# EAGLE board PTGSCH3 (EAGLE 7.7.0)
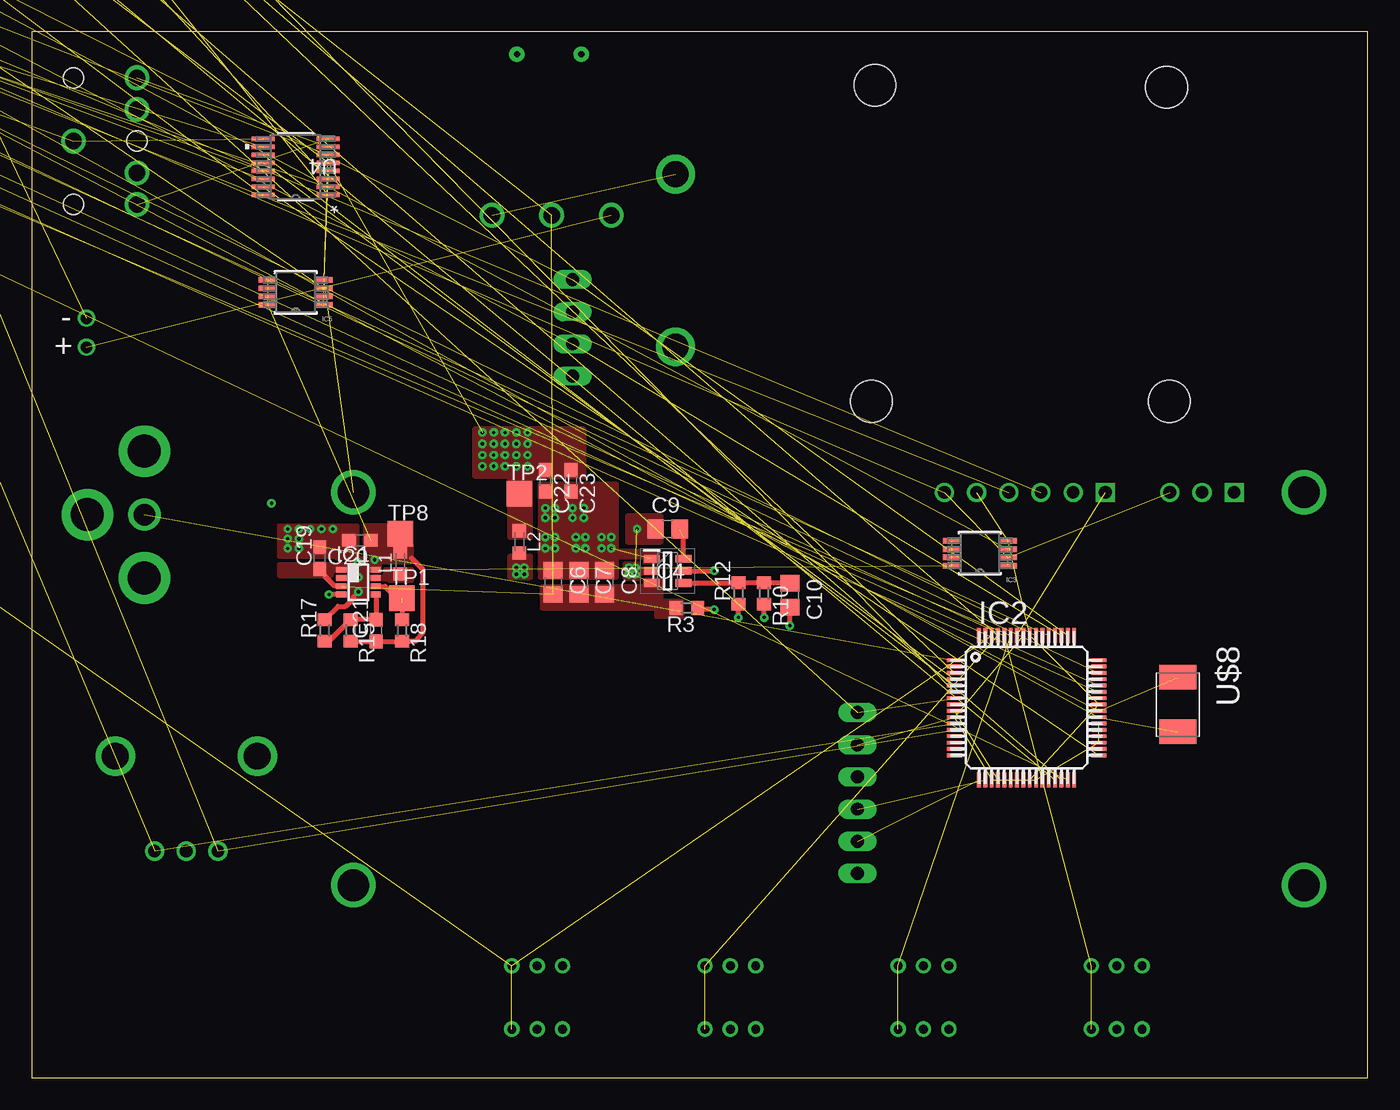
[diagram p0: board, top side]
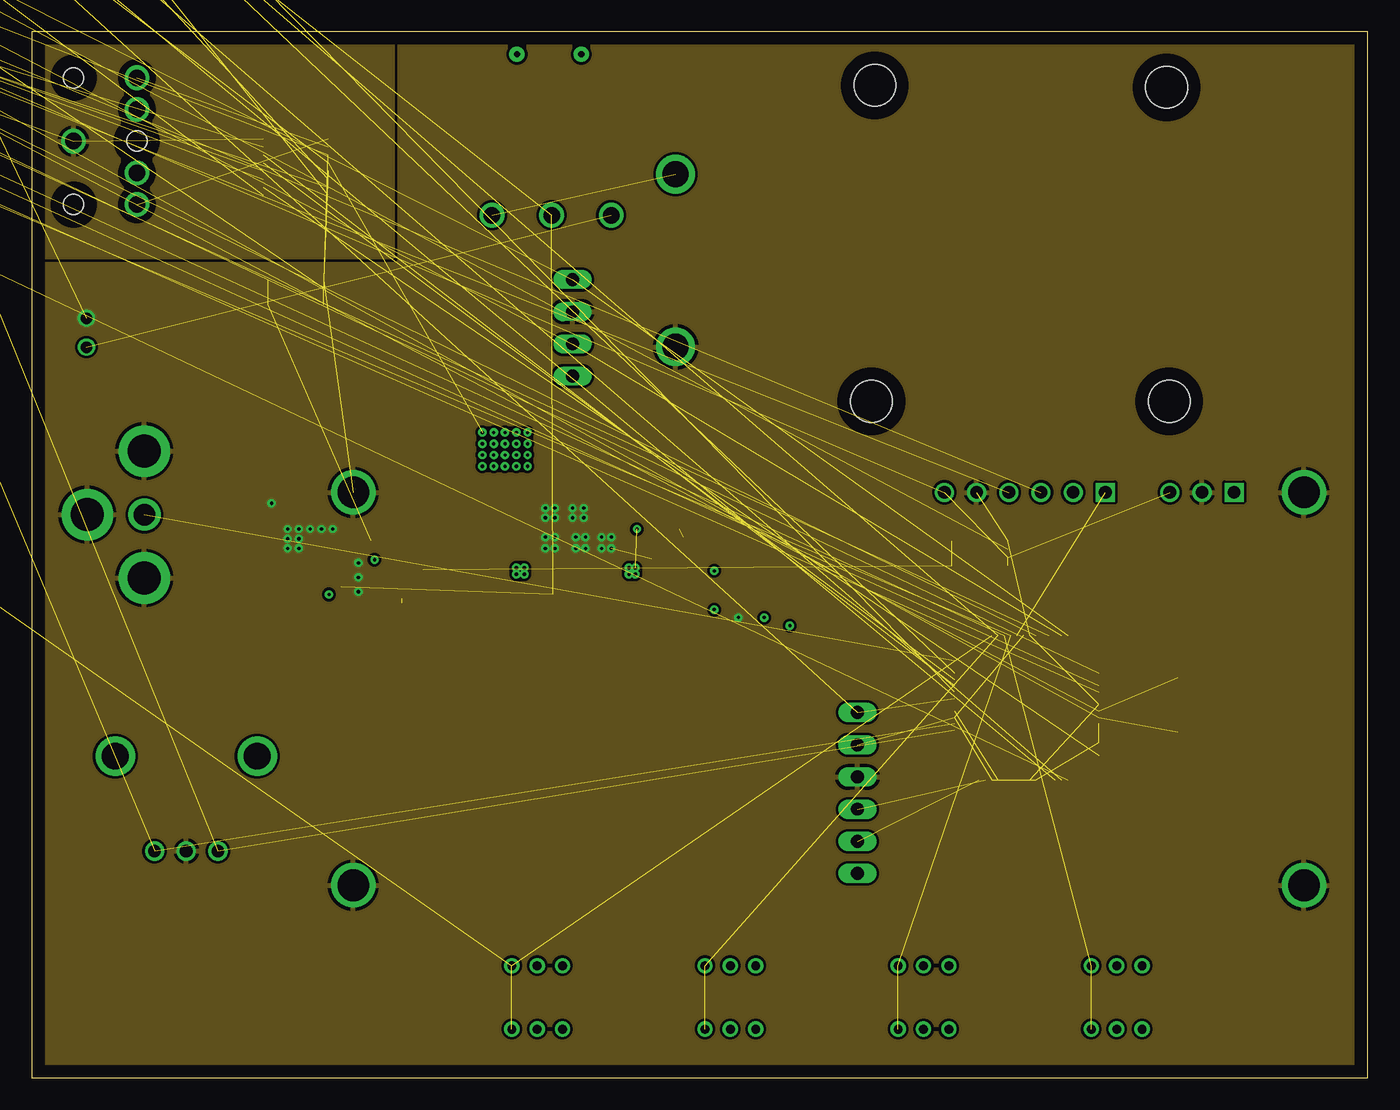
[diagram p1: board, inner layer GND]
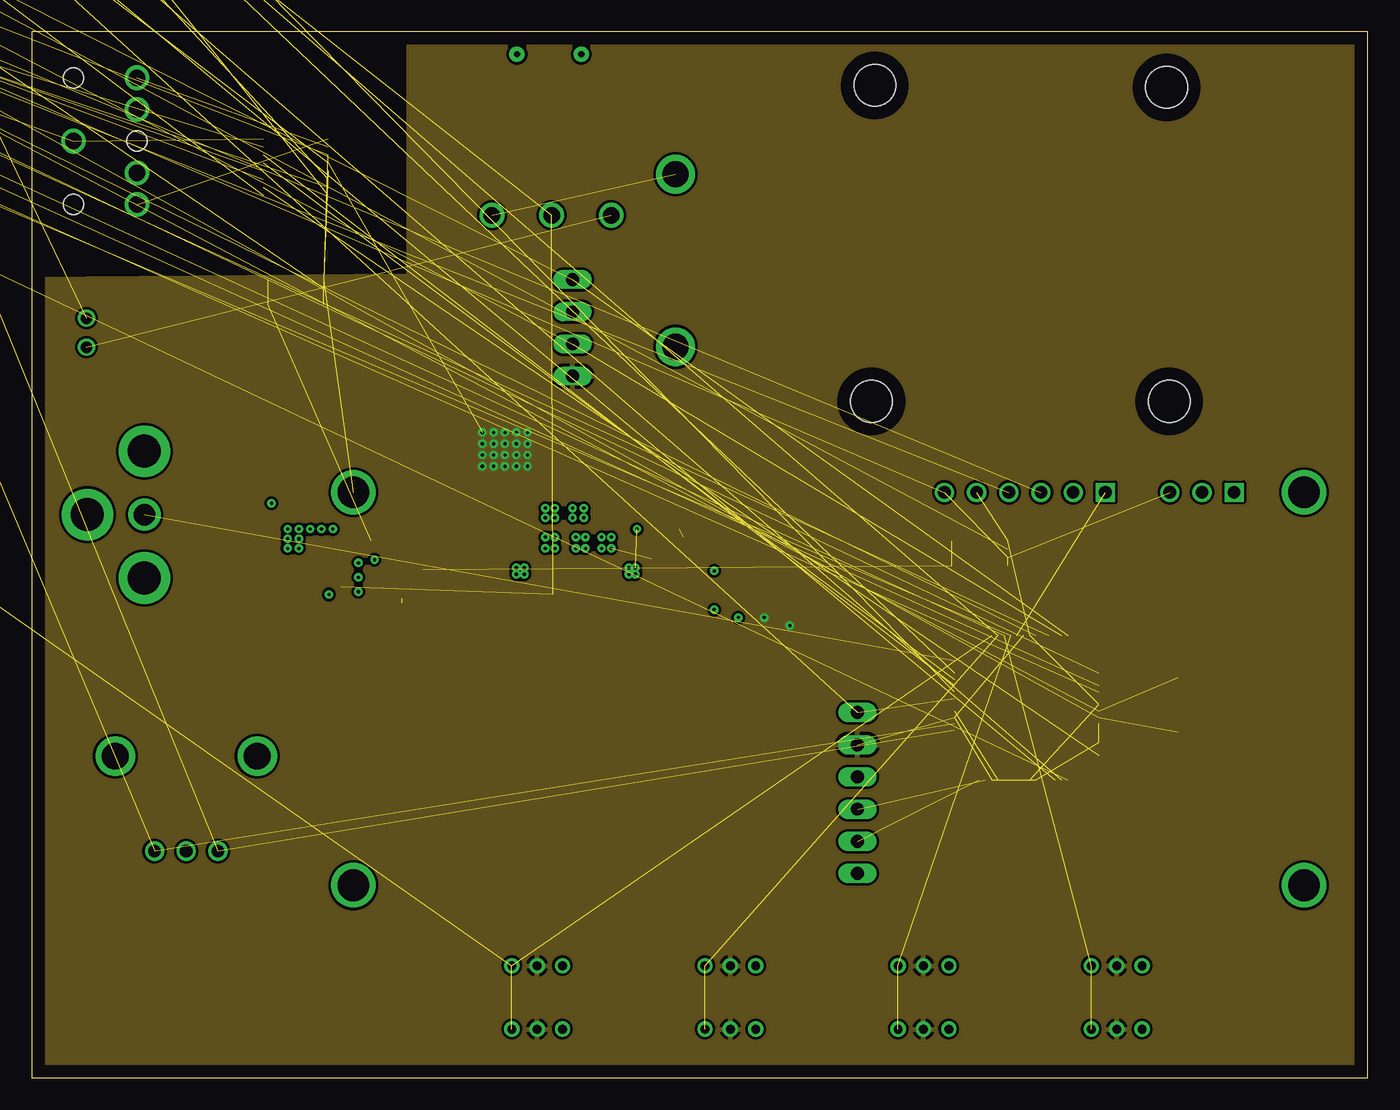
[diagram p2: board, inner layer PWR]
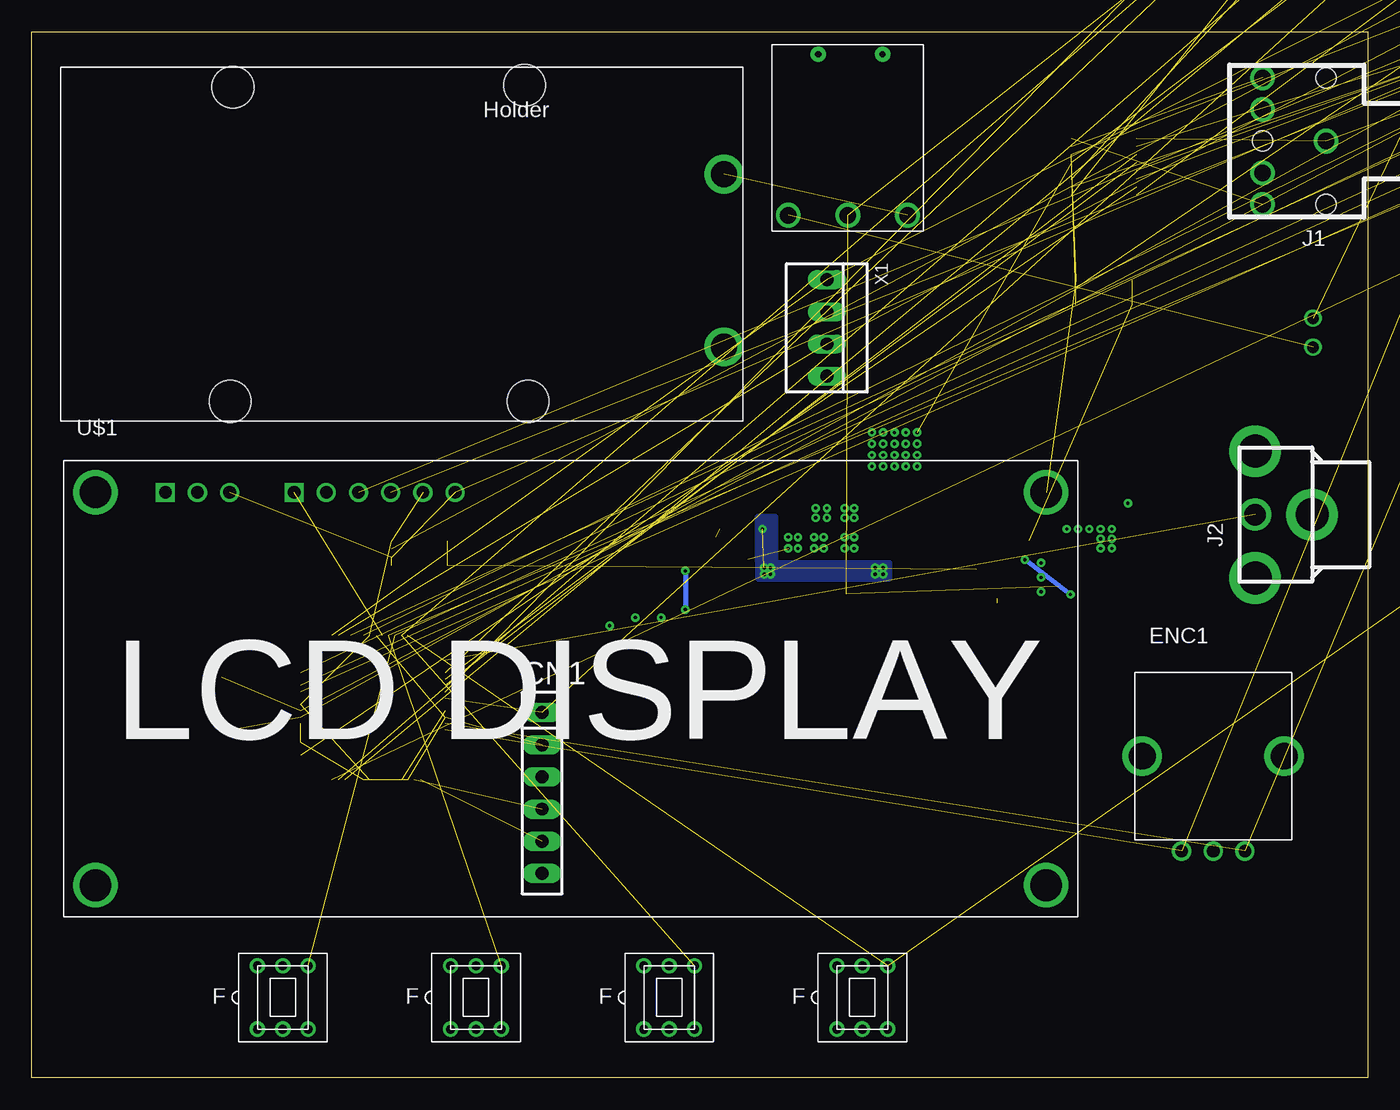
[diagram p3: board, bottom side, seen from below]

Size 105.41 x 82.55 mm. Coordinates in mm from the lower left corner, seen from the top.
Outline: 0,0 105.41,0 105.41,82.55 0,82.55 0,0
Copper layers (1*2*15*16): Top 0.035559375mm / dielectric 9mil / GND 0.035559375mm / dielectric 40mil / PWR 0.035559375mm / dielectric 9mil / Bottom 0.035559375mm
Design rules "default *": minimum track width 10mil, minimum drill 8mil, track to track 8mil, track to pad 8mil, pad to pad 8mil, via to via 8mil, smd to smd 8mil, copper to edge 40mil, drill to drill 8mil, minimum pad ring 10mil, minimum via ring 8mil, stop-mask expansion 4mil, vias tented up to drill 0mil, thermal gap 10mil

## Footprints (pad centres in the part's own frame; a part is rotated, then mirrored left to right if it is on the bottom)
BUTTON-DPDT-7MM = drill 0.7 pad 1: 1 -2,-2.5; 2 0,-2.5; 3 2,-2.5; 4 2,2.5; 5 0,2.5; 6 -2,2.5
C0805 = smd 1.3 x 1.5: 1 -0.95,0; 2 0.95,0
C0603 = smd 1.1 x 1: 1 -0.85,0; 2 0.85,0
SIP-100-6V = drill 1.016 long: 1 -6.35,0; 2 -3.81,0; 3 -1.27,0; 4 1.27,0; 5 3.81,0; 6 6.35,0
ENCODER = drill 2.1: HOLE1 -5.6,0; HOLE2 5.6,0 | drill 1: PIN_A -2.5,-7.5; PIN_B 2.5,-7.5; PIN_C 0,-7.5
DCN-R-PDSO-G8 = smd 0.45 x 0.8: 1 -0.975,-1.35; 2 -0.325,-1.35; 3 0.325,-1.35; 4 0.975,-1.35; 5 0.975,1.35; 6 0.325,1.35; 7 -0.325,1.35; 8 -0.975,1.35
TQFP64-10X10 = smd 1.2 x 0.3: 1 -5.7,3.75; 2 -5.7,3.25; 3 -5.7,2.75; 4 -5.7,2.25; 5 -5.7,1.75; 6 -5.7,1.25; 7 -5.7,0.75; 8 -5.7,0.25; 9 -5.7,-0.25; 10 -5.7,-0.75; 11 -5.7,-1.25; 12 -5.7,-1.75; 13 -5.7,-2.25; 14 -5.7,-2.75; 15 -5.7,-3.25; 16 -5.7,-3.75; 33 5.7,-3.75; 34 5.7,-3.25; 35 5.7,-2.75; 36 5.7,-2.25; 37 5.7,-1.75; 38 5.7,-1.25; 39 5.7,-0.75; 40 5.7,-0.25; 41 5.7,0.25; 42 5.7,0.75; 43 5.7,1.25; 44 5.7,1.75; 45 5.7,2.25; 46 5.7,2.75; 47 5.7,3.25; 48 5.7,3.75 | smd 0.3 x 1.2: 17 -3.75,-5.7; 18 -3.25,-5.7; 19 -2.75,-5.7; 20 -2.25,-5.7; 21 -1.75,-5.7; 22 -1.25,-5.7; 23 -0.75,-5.7; 24 -0.25,-5.7; 25 0.25,-5.7; 26 0.75,-5.7; 27 1.25,-5.7; 28 1.75,-5.7; 29 2.25,-5.7; 30 2.75,-5.7; 31 3.25,-5.7; 32 3.75,-5.7; 49 3.75,5.7; 50 3.25,5.7; 51 2.75,5.7; 52 2.25,5.7; 53 1.75,5.7; 54 1.25,5.7; 55 0.75,5.7; 56 0.25,5.7; 57 -0.25,5.7; 58 -0.75,5.7; 59 -1.25,5.7; 60 -1.75,5.7; 61 -2.25,5.7; 62 -2.75,5.7; 63 -3.25,5.7; 64 -3.75,5.7
MSOP-8_MS = smd 1.397 x 0.432: 1 -2.21,0.975; 2 -2.21,0.325; 3 -2.21,-0.325; 4 -2.21,-0.975; 5 2.21,-0.975; 6 2.21,-0.325; 7 2.21,0.325; 8 2.21,0.975
SOT95P280X110-6N = smd 1.25 x 0.6: 1 -1.25,0.95; 2 -1.25,0; 3 -1.25,-0.95; 4 1.25,-0.95; 5 1.25,0; 6 1.25,0.95
STX-3100-5N = drill 1.3: 1 0,0; 2 5,5; 3 5,2.5; 4 5,-2.5; 5 5,-5 | hole 1.6: 0,-5; 0,5; 5,0
RCA_RA_PCB_SINGLE = drill 2.591 pad 4.064: 1 -5.004,0; 3 5.004,0; 4 0,4.496 | drill 1.702: 2 0,0
C0603K = smd 1.05 x 1.08: 1 -0.875,0; 2 0.875,0
0805_10MGAP = smd 1.2 x 1.5: 1 -1.05,0; 2 1.05,0
R0603 = smd 1 x 1.1: 1 -0.85,0; 2 0.85,0
TP20SQ = smd 2 x 2: TP 0,0
DBQ16 = smd 1.803 x 0.356: 1 -2.553,2.223; 2 -2.553,1.587; 3 -2.553,0.953; 4 -2.553,0.318; 5 -2.553,-0.318; 6 -2.553,-0.953; 7 -2.553,-1.587; 8 -2.553,-2.223; 9 2.553,-2.223; 10 2.553,-1.587; 11 2.553,-0.953; 12 2.553,-0.318; 13 2.553,0.318; 14 2.553,0.953; 15 2.553,1.587; 16 2.553,2.223
NHD-0216K3Z-FL-GBW-V3 = drill 1 square: J1-1 8,33.5; J2-1 18.16,33.5 | drill 1: J1-2 10.54,33.5; J1-3 13.08,33.5; J2-2 20.7,33.5; J2-3 23.24,33.5; J2-4 25.78,33.5; J2-5 28.32,33.5; J2-6 30.86,33.5 | drill 2.5: M1 2.5,2.5; M2 2.5,33.5; M3 77.5,33.5; M4 77.5,2.5
HOLDER = drill 2.057: + -16.256,5.918; - -16.256,19.533 | hole 3.302: -0.538,-1.1; 22.479,-0.94; -0.808,23.825; 22.684,23.825
ROCKERVIAS = drill 1.3 pad 1.854: 1 0,0; 2 0,4.7; 3 0,9.4 | drill 0.5 pad 1.219: SIDEMOUNT -12.7,7.43; SIDEMOUNT1 -12.7,2.35
XTAL500X320X130N = smd 1.95 x 2.95: 1 -2.15,0; 2 2.15,0
22-23-2041 = drill 1 long: 1 -3.81,0; 2 -1.27,0; 3 1.27,0; 4 3.81,0

## Placement (x,y rotation side)
BUTTON1  BUTTON-DPDT-7MM  [BUTTON-DPDT-7MM]  85.6,6.35 0 bottom
BUTTON2  BUTTON-DPDT-7MM  [BUTTON-DPDT-7MM]  70.36,6.35 0 bottom
BUTTON3  BUTTON-DPDT-7MM  [BUTTON-DPDT-7MM]  39.88,6.35 0 bottom
BUTTON4  BUTTON-DPDT-7MM  [BUTTON-DPDT-7MM]  55.12,6.35 0 bottom
C1  0.1uF  [C0805]  -105.41,92.71 0 top  (outside the outline)
C2  10nF  [C0603]  -55.88,115.57 0 top  (outside the outline)
C3  10uF  [C0805]  -55.88,104.14 0 top  (outside the outline)
C4  10nF  [C0603]  -62.23,115.57 0 top  (outside the outline)
C5  10uF  [C0805]  -62.23,104.14 0 top  (outside the outline)
C6  10uF  [C0805]  41.15,39.12 270 top
C7  10uF  [C0805]  43.18,39.12 270 top
C8  NP  [C0805]  45.21,39.12 270 top
C9  0.1uF  [C0805]  50.16,43.31 0 top
C10  NP  [C0805]  59.82,38.1 270 top
C11  0.1uF  [C0805]  -17.78,104.14 0 top  (outside the outline)
C12  0.1uF  [C0805]  -24.13,104.14 0 top  (outside the outline)
C13  0.1uF  [C0805]  -30.48,104.14 0 top  (outside the outline)
C14  27 pF  [C0603]  -63.5,110.49 0 top  (outside the outline)
C15  27 pF  [C0603]  -69.85,110.49 0 top  (outside the outline)
C16  NP  [C0805]  -91.44,104.14 0 top  (outside the outline)
C17  NP  [C0805]  -96.52,104.14 0 top  (outside the outline)
C18  10uF  [C0805]  -81.28,104.14 0 top  (outside the outline)
C19  4.7uF  [C0603]  22.73,41.02 90 top
C20  4.7uF  [C0603]  25.91,42.42 180 top
C21  22pF  [C0603]  27.18,35.31 90 top
C22  22uF  [C0603]  40.51,47.12 270 top
C23  22uF  [C0603]  42.55,47.12 270 top
C24  0.1uF  [C0805]  -36.83,104.14 0 top  (outside the outline)
C25  0.1uF  [C0805]  -43.18,104.14 0 top  (outside the outline)
C26  0.1uF  [C0805]  -49.53,104.14 0 top  (outside the outline)
CN1  [SIP-100-6V]  65.15,22.48 270 bottom
ENC1  ENCODERENCODER  [ENCODER]  12.19,25.4 0 bottom
IC1  TPS62120  [DCN-R-PDSO-G8]  25.78,39.12 270 top
IC2  PIC32MK1024MCF064-I_PT  [TQFP64-10X10]  78.49,29.21 0 top
IC3  LT1762EMS8-5PBF  [MSOP-8_MS]  74.8,41.4 180 top
IC4  TPS561208DDCR  [SOT95P280X110-6N]  50.16,40.01 0 top
IC5  LT1762EMS8-5PBF  [MSOP-8_MS]  20.83,61.98 180 top
J1  STX-3100-5N  [STX-3100-5N]  3.3,73.91 180 bottom
J2  RCJ-01X_PHONO_SINGLE  [RCA_RA_PCB_SINGLE]  8.89,44.45 270 bottom
L1  22uH  [C0603K]  29.08,40.64 90 top
L2  2.20uH  [C0603K]  38.48,42.29 270 top
LED1  GREENLED  [0805_10MGAP]  -35.56,125.73 0 top  (outside the outline)
LED2  GREENLED  [0805_10MGAP]  -43.18,125.73 0 top  (outside the outline)
LED3  GREENLED  [0805_10MGAP]  -50.8,125.73 0 top  (outside the outline)
R1  1.00K  [R0603]  -25.4,110.49 0 top  (outside the outline)
R2  10.0k  [R0603]  -88.9,110.49 0 top  (outside the outline)
R3  10.0k  [R0603]  51.69,37.08 180 top
R4  10.0k  [R0603]  -101.6,110.49 0 top  (outside the outline)
R5  10.0k  [R0603]  -107.95,110.49 0 top  (outside the outline)
R6  10.0k  [R0603]  -17.78,115.57 0 top  (outside the outline)
R7  10.0K  [R0603]  -31.75,110.49 0 top  (outside the outline)
R8  64.9  [R0603]  -86.36,115.57 0 top  (outside the outline)
R9  332  [R0603]  -36.83,120.65 0 top  (outside the outline)
R10  3.09K  [R0603]  57.78,38.23 270 top
R11  332  [R0603]  -31.75,120.65 0 top  (outside the outline)
R12  10.0K  [R0603]  55.75,38.23 90 top
R13  10.0K  [R0603]  -50.8,110.49 0 top  (outside the outline)
R14  10.0K  [R0603]  -57.15,110.49 0 top  (outside the outline)
R15  562K  [R0603]  25.15,35.31 270 top
R16  10.0k  [R0603]  -24.13,115.57 0 top  (outside the outline)
R17  100K  [R0603]  23.11,35.31 90 top
R18  100K  [R0603]  29.21,35.31 270 top
R19  10.0k  [R0603]  -30.48,115.57 0 top  (outside the outline)
R20  64.9  [R0603]  -91.44,115.57 0 top  (outside the outline)
R21  64.9  [R0603]  -96.52,115.57 0 top  (outside the outline)
R22  64.9  [R0603]  -101.6,115.57 0 top  (outside the outline)
R23  64.9  [R0603]  -106.68,115.57 0 top  (outside the outline)
R27  64.9  [R0603]  -111.76,115.57 0 top  (outside the outline)
R28  64.9  [R0603]  -16.51,120.65 0 top  (outside the outline)
R29  64.9  [R0603]  -21.59,120.65 0 top  (outside the outline)
R31  365  [R0603]  -26.67,120.65 0 top  (outside the outline)
TP1  TPTP20SQ  [TP20SQ]  29.21,37.85 0 top
TP2  TPTP20SQ  [TP20SQ]  38.48,46.1 0 top
TP3  TPTP20SQ  [TP20SQ]  -64.77,120.65 0 top  (outside the outline)
TP4  TPTP20SQ  [TP20SQ]  -69.85,120.65 0 top  (outside the outline)
TP5  TPTP20SQ  [TP20SQ]  -74.93,120.65 0 top  (outside the outline)
TP8  TPTP20SQ  [TP20SQ]  29.08,42.93 0 top
TP9  TPTP20SQ  [TP20SQ]  -85.09,120.65 0 top  (outside the outline)
TP10  TPTP20SQ  [TP20SQ]  -43.18,120.65 0 top  (outside the outline)
TP11  TPTP20SQ  [TP20SQ]  -49.53,120.65 0 top  (outside the outline)
U4  PCM1748E/2K  [DBQ16]  20.83,71.88 180 top
U$1  NHD-0216K3Z-FL-GBW-V3  [NHD-0216K3Z-FL-GBW-V3]  102.87,12.7 0 bottom
U$2  BATTERY_HOLDER  [HOLDER]  67.06,77.22 180 bottom
U$3  POWERSWITCH  [ROCKERVIAS]  45.72,68.07 270 bottom
U$8  EXTERNALCRYSTAL  [XTAL500X320X130N]  90.42,29.46 270 top
X1  22-23-2041  [22-23-2041]  42.67,59.18 270 bottom

## Library data of the parts
BUTTON1-BUTTON4 = button-dpdt-7mm
C1-C26 R2 R4-R6 R8 R9 R11 R13 R14 R16 R19-R23 R27-R29 = rcl
CN1 = con-hdrs40
ENC1 = ENCODER_PTG
IC1 = texas
IC2 = PIC_FORREAL
IC3 IC5 = LDO; AVAILABILITY: Good; DESCRIPTION: PMIC - LDO voltage regulator Linear Technology LT1762EMS8-5#PBF Positive, fixed MSOP 8; MF: Linear Technology; MP: LT1762EMS8-5#PBF; PACKAGE: TSSOP-8 Linear Technology; PRICE: 1.89 USD
IC4 = TPS561208DDCR; DESCRIPTION: 4.5V to 17V Input, 2A Output, Synchronous SWIFT Step-Down Converter; HEIGHT: 1.1mm; MANUFACTURER_NAME: Texas Instruments; MANUFACTURER_PART_NUMBER: TPS561208DDCR
J1 L1 L2 = NewSDR
J2 = RCA
LED1-LED3 = GreenLED
R1 R3 R7 R10 R12 R15 R17 R18 R31 = resistor
TP1-TP5 TP8-TP11 = testpad
U4 = PCM1748; MANUFACTURER_PART_NUMBER: PCM1748E2K; VENDOR: Texas Instruments
U$1 = realdisplay
U$2 = BattHolder
U$3 = RockerSwitch
U$8 = XTAL500X320X130N
X1 = 22-23-2041; AVAILABILITY: Good; DESCRIPTION: KK® 254 Solid Header, Vertical, with Friction Lock, 4 Circuits, Tin _Sn_ Plating; MF: Molex; MP: 22-23-2041; PACKAGE: None; PRICE: 0.14 USD

## Nets
5V_I/O: C20.1 C21.1 IC1.4 IC1.8 IC3.5 IC3.8 IC5.5 IC5.8 L1.2 R15.2 R18.2 TP8.TP
!DAC_CS: IC2.33 U4.15
!MCLR: CN1.1 IC2.7 R1.2
+3V3: BUTTON1.2 BUTTON1.5 BUTTON2.2 BUTTON2.5 BUTTON3.2 BUTTON3.5 BUTTON4.2 BUTTON4.5 C1.1 C10.2 C11.1 C12.2 C16.1 C22.1 C23.1 C24.1 C25.1 C26.1 CN1.2 IC2.10 IC2.19 IC2.26 IC2.35 IC2.38 IC2.57 L2.1 R7.1 R10.2 R13.2 R14.2 R16.2 R19.2 TP2.TP U4.5 X1.4
+5_DAC: C2.1 C3.1 C17.1 IC5.1 IC5.2 TP4.TP U4.6
ADD_TEST_PAD: IC1.6 R18.1 TP1.TP
AGND: C18.2 J1.1 U4.9
BUTTON1: BUTTON1.3 BUTTON1.4 IC2.60 R2.2
BUTTON2: BUTTON2.3 BUTTON2.4 IC2.59 R4.2
BUTTON3: BUTTON3.3 BUTTON3.4 IC2.62 R5.2
BUTTON4: BUTTON4.3 BUTTON4.4 IC2.61 R6.2
DAC_BCK: R28.1 TP10.TP U4.1
DAC_DATA: R27.2 U4.2
DAC_LRCK: R29.1 TP9.TP U4.3
DAC_SPI_CLK: R22.2 U4.14
DAC_SPI_DATA: R23.2 U4.13
DAC_ZEROH: IC2.5 U4.11
DAC_ZEROL: IC2.4 U4.12
DIS_!CS: IC2.58 U$1.J2-1
DIS_SCK: R8.1 U$1.J2-3
DIS_SDI: R21.1 U$1.J2-4
ENC_A: ENC1.PIN_A IC2.12 R16.1
ENC_B: ENC1.PIN_B IC2.11 R19.1
GND: C1.2 C3.2 C5.2 C6.1 C7.1 C8.1 C11.2 C12.1 C13.2 C14.2 C15.2 C16.2 C17.2 C19.2 C20.2 C22.2 C23.2 C24.2 C25.2 C26.2 CN1.3 ENC1.PIN_C IC1.2 IC2.9 IC2.20 IC2.25 IC2.41 IC2.56 IC3.4 IC4.1 IC5.4 J2.1 J2.3 J2.4 LED1.1 LED2.1 LED3.1 R2.1 R4.1 R5.1 R6.1 R12.1 R17.2 U4.4 U$1.J1-2 U$1.J2-5 U$1.M1 U$1.M2 U$1.M3 U$1.M4 U$2.- X1.2
N$1: U$2.+ U$3.3
N$2: C10.1 IC4.4 R10.1 R12.2
N$3: IC2.55 R8.2
N$4: C9.1 IC4.2 L2.2
N$5: C9.2 IC4.6
N$6: IC4.5 R3.1
N$7: IC1.7 L1.1
N$8: C21.2 IC1.5 R15.1 R17.1
N$9: C2.2 IC5.3
N$10: IC2.53 R21.2
N$11: LED2.2 R9.1
N$12: LED1.2 R11.1
N$13: LED3.2 R31.1
N$14: IC2.46 R20.1
N$15: IC2.30 R11.2
N$16: CN1.5 IC2.17
N$17: IC2.29 R9.2
N$18: C13.1 R1.1 R7.2
N$19: C18.1 U4.10
N$20: IC2.3 R29.2
N$21: IC2.44 R22.1
N$23: C4.2 IC3.3
N$25: CN1.4 IC2.18
N$27: IC2.43 R23.1
N$30: IC2.31 R27.1
N$31: IC2.6 R28.2
OSCI: C14.1 IC2.39 U$8.2
OSCO: C15.1 IC2.40 U$8.1
PWR_PINS: U$3.1
SIGNAL_L: J1.5 U4.7
SIGNAL_R: J1.2 U4.8
SUPPLY: C6.2 C7.2 C8.2 C19.1 IC1.1 IC1.3 IC4.3 R3.2 R31.2 TP5.TP U$3.2
SYS_CLK: R20.2 TP11.TP U4.16
TRIGGER: IC2.1 J2.2
UART-RX: IC2.50 R13.1 X1.1
UART-TX: IC2.51 R14.1 X1.3
VOUT_LCD: C4.1 C5.1 IC3.1 IC3.2 TP3.TP U$1.J1-3 U$1.J2-6

## Tracks (layer width: path | path; a pad name or v marks a point on that pad's centre or on a via)
5V_I/O  (via drill 0.25 pad 0.25)  (4 unrouted)
  Top 0.406: R15.2 C21.1 R18.2 30.27,34.46 30.86,35.18 30.86,40.13 29.97,41.02 | IC1.4 v23.46,38.14
  Bottom 0.406: v23.46,38.14 v27.05,40.89
  pour Top (no thermals): 26.8,39.88 27.43,39.88 27.43,40.77 29.97,40.77 29.97,42.04 27.94,42.04 27.94,43.56 26.29,43.56 26.29,41.78 26.29,41.66 26.8,41.66
!DAC_CS  (1 unrouted)
!MCLR  (2 unrouted)
+3V3  (via drill 0.25)  (19 unrouted)
  Top 0.406: 40.64,48.01 C22.1 | TP2.TP 38.47,45.34 | v57.78,36.32 R10.2 | v59.82,35.69 C10.2
  other vias: 38.23,49.15 39.12,49.15 38.23,48.26 39.12,48.26 37.34,49.15 37.34,48.26 36.45,48.26 36.45,49.15 36.45,50.04 37.34,50.04 38.23,50.04 39.12,50.04 39.12,50.93 38.23,50.93 37.34,50.93 36.45,50.93 35.56,48.26 35.56,49.15 35.56,50.04 35.56,50.93
  pour PWR: 0,0 105.41,0 105.41,82.55 29.72,82.8 29.72,63.25 0,62.99
  pour Top (rank 2, no thermals): 39.37,47.37 43.56,47.37 43.56,51.18 34.92,51.18 34.92,47.5 37.72,47.5 37.72,42.67 39.37,42.67
+5_DAC  (6 unrouted)
ADD_TEST_PAD  (1 unrouted)
  Top 0.406: IC1.6 27.88,38.79 29.21,37.47 R18.1
AGND  (2 unrouted)
  pour GND (isolate 0.508): 0,82.55 28.45,82.55 28.45,64.77 0,64.77
BUTTON1  (3 unrouted)
BUTTON2  (3 unrouted)
BUTTON3  (3 unrouted)
BUTTON4  (3 unrouted)
DAC_BCK  (2 unrouted)
DAC_DATA  (1 unrouted)
DAC_LRCK  (2 unrouted)
DAC_SPI_CLK  (1 unrouted)
DAC_SPI_DATA  (1 unrouted)
DAC_ZEROH  (1 unrouted)
DAC_ZEROL  (1 unrouted)
DIS_!CS  (1 unrouted)
DIS_SCK  (1 unrouted)
DIS_SDI  (1 unrouted)
ENC_A  (2 unrouted)
ENC_B  (2 unrouted)
GND  (via drill 0.25, 0.25 pad 0.15, 0.25 pad 0.25, 0.9)  (29 unrouted)
  Top 0.406: v55.75,36.32 R12.1 | R17.2 24.17,37.21 24.77,37.21 25.4,37.85 25.4,37.97
  other vias: 4.32,59.94 41.27,41.78 43.69,41.78 45.72,41.78 40.51,41.78 42.93,41.78 44.96,41.78 40.51,44.96 42.67,44.96 40.51,42.67 41.27,42.67 42.93,42.67 43.69,42.67 44.96,42.67 45.72,42.67 40.51,44.2 42.67,44.2 43.56,44.96 43.56,44.2 41.27,44.96 41.27,44.2 18.92,45.34 21.97,43.31 22.86,43.31 23.75,43.31 21.08,43.31 21.08,42.55 20.19,43.31 20.19,42.55 21.08,41.78 20.19,41.78 25.78,40.64 25.78,39.5 25.78,38.35
  pour GND (rank 6): 0,0 105.41,0 105.41,82.55 0,82.55
  pour Top (no thermals): 40.13,39.5 40.13,46.86 46.1,46.86 46.1,39.5
  pour Top (no thermals): 48.39,40.64 49.4,40.64 49.4,41.53 46.23,41.53 46.23,41.15 48.39,41.15
  pour Top (no thermals): 24.13,43.56 25.65,43.56 25.65,41.02 26.29,41.02 26.29,37.85 25.27,37.85 25.27,41.02 24.13,41.02
  pour Top (no thermals): 25.4,39.62 24.13,39.62 24.13,39.24 25.4,39.24
  pour Top (no thermals): 24.13,41.15 19.56,41.15 19.56,43.56 24.13,43.56
N$1  (1 unrouted)
N$2
  Top 0.406: 51.41,38.99 IC4.4 55.75,39.05 R12.2 R10.1 59.82,39.08 C10.1
N$3  (1 unrouted)
N$4  (via drill 0.25 pad 0.15)  (1 unrouted)
  other vias: 47.62,40.26 47.62,39.75 47.12,40.26 47.12,39.75 38.23,40.26 38.86,40.26 38.23,39.75 38.86,39.75 47.75,43.31
  pour Top (no thermals): 37.72,41.15 37.72,39.5 39.37,39.5 39.37,41.15
  pour Top (rank 2, no thermals): 46.74,40.64 46.74,39.37 49.4,39.37 49.4,40.64
  pour Top (no thermals): 49.66,43.69 49.66,44.32 46.99,44.32 46.99,42.29 49.66,42.29
  pour Bottom: 37.72,40.64 48.13,40.64 48.13,39.37 37.72,39.37
  pour Bottom (no thermals): 48.13,40.77 48.13,44.32 46.74,44.32 46.74,40.77
N$5  (1 unrouted)
  Top 0.406: IC4.6 51.44,40.95 51.44,42.67
N$6  (via drill 0.25)
  Top 0.406: IC4.5 v53.85,40.01 | v53.85,36.96 52.54,36.96 R3.1
  Bottom 0.406: v53.85,40.01 v53.85,36.96
N$7
  pour Top (no thermals): 26.8,39.62 27.94,39.62 27.94,40.13 29.97,40.13 29.97,39.24 26.8,39.24
N$8
  Top 0.406: IC1.5 27.18,38.14 C21.2 R15.1 23.45,34.46 R17.1
N$9  (1 unrouted)
N$10  (1 unrouted)
N$11  (1 unrouted)
N$12  (1 unrouted)
N$13  (1 unrouted)
N$14  (1 unrouted)
N$15  (1 unrouted)
N$16  (1 unrouted)
N$17  (1 unrouted)
N$18  (2 unrouted)
N$19  (1 unrouted)
N$20  (1 unrouted)
N$21  (1 unrouted)
N$23  (1 unrouted)
N$25  (1 unrouted)
N$27  (1 unrouted)
N$30  (1 unrouted)
N$31  (1 unrouted)
OSCI  (2 unrouted)
OSCO  (2 unrouted)
PWR_PINS  (via drill 0.9)  (1 unrouted)
  other vias: 4.32,57.66
SIGNAL_L  (1 unrouted)
SIGNAL_R  (1 unrouted)
SUPPLY  (4 unrouted)
  Top 0.406: IC1.3 23.95,38.79 23.11,39.62
  pour Top (no thermals): 49.53,39.24 48.39,39.24 48.39,38.73 40.26,38.73 40.26,37.08 49.66,37.08 49.66,39.24
  pour Top (no thermals): 51.31,37.59 49.28,37.59 49.28,36.45 51.31,36.45 51.31,37.47
  pour Top (no thermals): 24.77,40.51 24.77,40.01 23.62,40.01 23.62,39.62 19.56,39.62 19.56,40.51
SYS_CLK  (2 unrouted)
TRIGGER  (1 unrouted)
UART-RX  (2 unrouted)
UART-TX  (2 unrouted)
VOUT_LCD  (6 unrouted)

## Text on the board
tPlace: - | +